# Altium PCB PCB1.PcbDoc
Units mm, origin at the board's own origin, x right, y up, seen from the top; angles counter-clockwise.
Board outline 53.21 x 28.07 mm, 2 copper layers (Top Layer, Bottom Layer); 11 components, 10 nets, 28 pads, 0 vias.
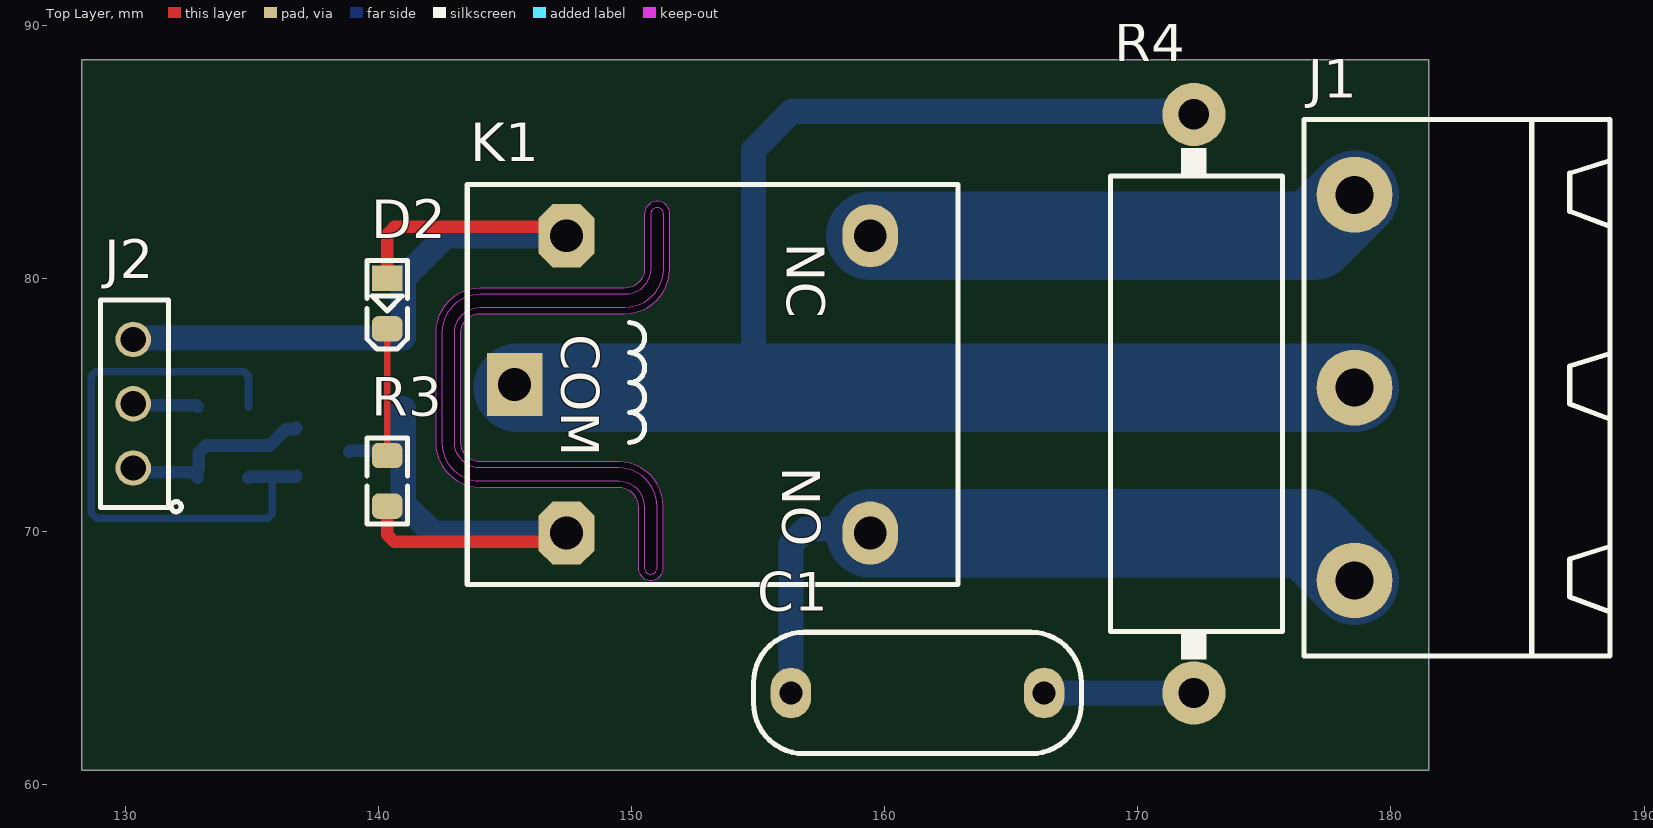
[diagram p0: Top Layer view]
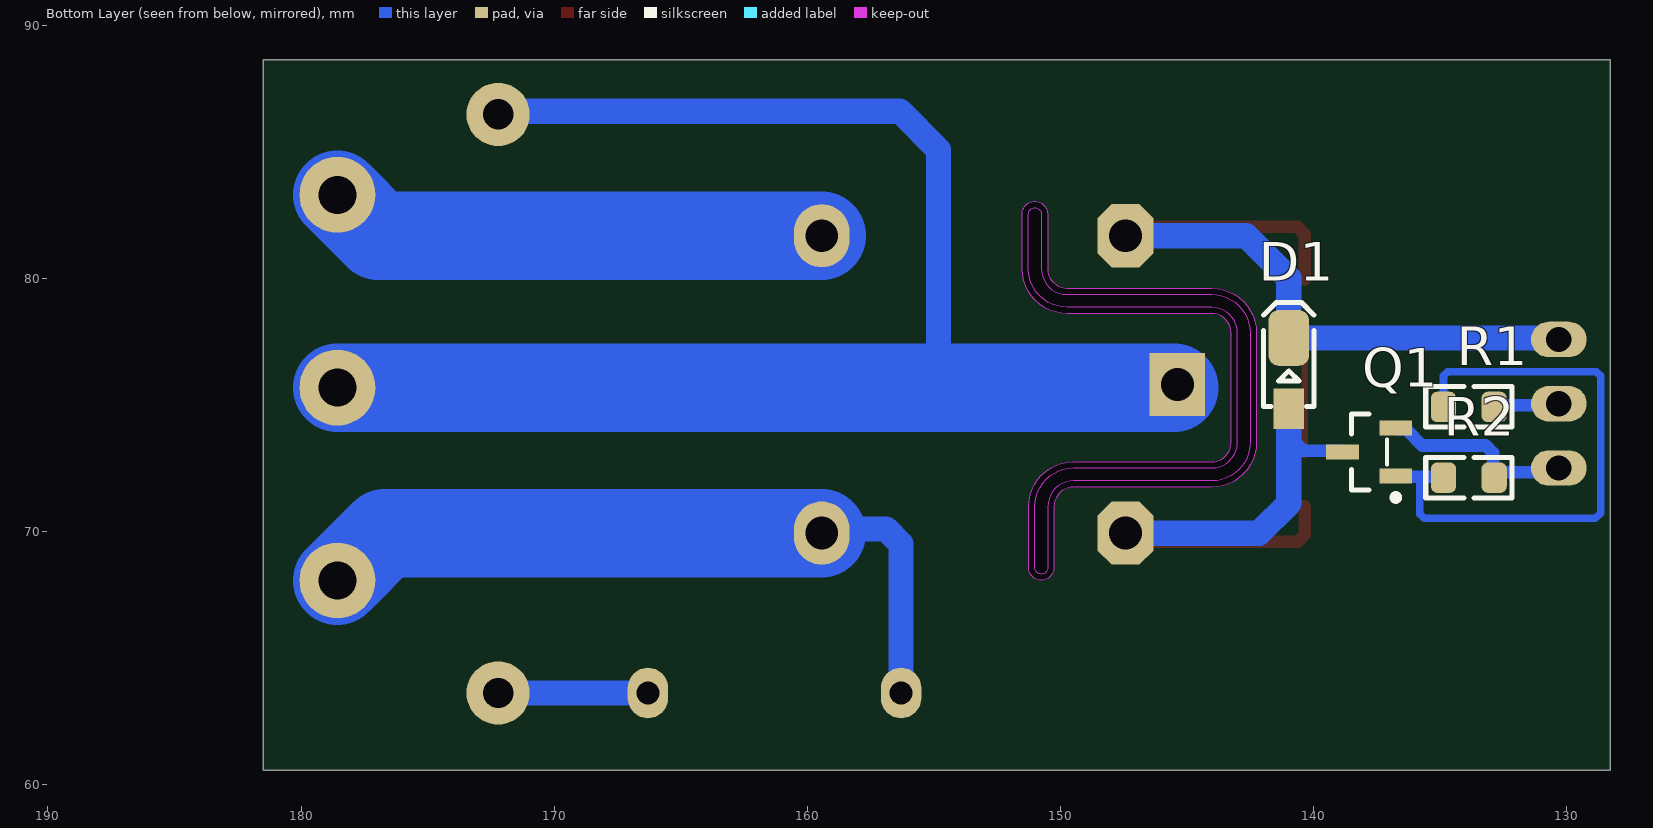
[diagram p1: Bottom Layer view, seen from below]
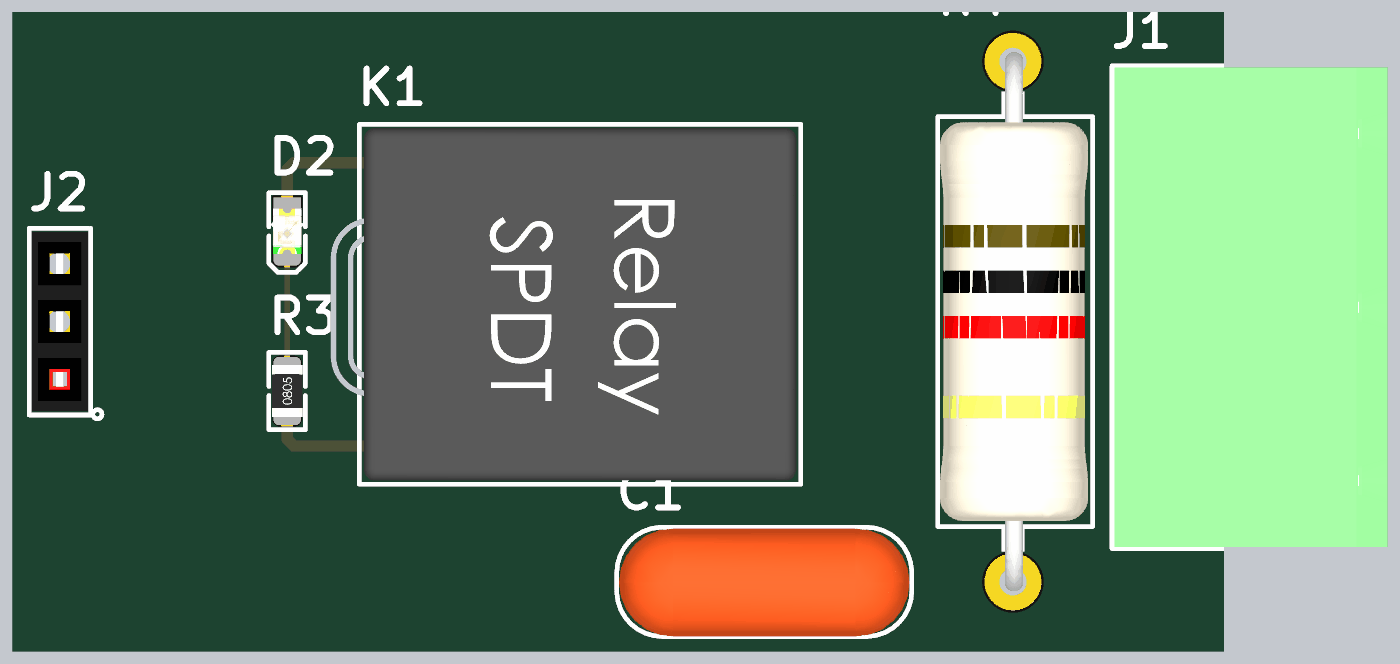
[diagram p2: 3D render of the assembled board from above, using the file's embedded part models]
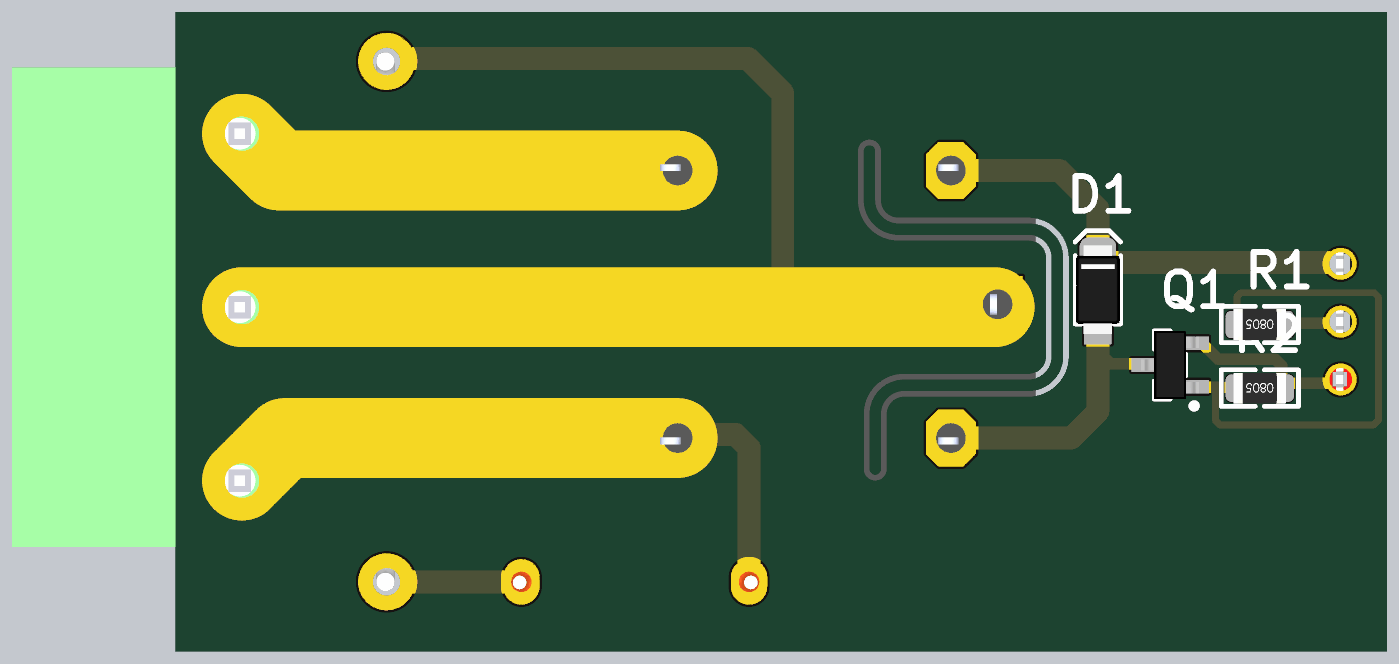
[diagram p3: 3D render of the assembled board from below, using the file's embedded part models]

## Layer stack, top to bottom
Top Solder: solder mask 0.0102, Solder Resist, Dk 3.5
Top Layer: signal copper 0.0356
Dielectric 1: dielectric 0.32, FR-4, Dk 4.8
Bottom Layer: signal copper 0.0356
Bottom Solder: solder mask 0.0102, Solder Resist, Dk 3.5

## Board outline
128.27,60.579 181.483,60.579 181.483,88.646 128.27,88.646
cut-out: 142.248,73.533 ccw(c144.018,73.533) 144.018,71.763 149.479,71.763 cw(c149.479,70.993) 150.249,70.993 150.249,68.58 ccw(c150.749,68.58) 151.249,68.58 151.249,70.993 ccw(c149.479,70.993) 149.479,72.763 144.018,72.763 cw(c144.018,73.533) 143.248,73.533 143.248,77.851 cw(c144.018,77.851) 144.018,78.621 149.733,78.621 ccw(c149.733,80.391) 151.503,80.391 151.503,82.55 ccw(c151.003,82.55) 150.503,82.55 150.503,80.391 cw(c149.733,80.391) 149.733,79.621 144.018,79.621 ccw(c144.018,77.851) 142.248,77.851
cut-out: 142.494,73.533 ccw(c144.018,73.533) 144.018,72.009 149.479,72.009 cw(c149.479,70.993) 150.495,70.993 150.495,68.58 ccw(c150.749,68.58) 151.003,68.58 151.003,70.993 ccw(c149.479,70.993) 149.479,72.517 144.018,72.517 cw(c144.018,73.533) 143.002,73.533 143.002,77.851 cw(c144.018,77.851) 144.018,78.867 149.733,78.867 ccw(c149.733,80.391) 151.257,80.391 151.257,82.55 ccw(c151.003,82.55) 150.749,82.55 150.749,80.391 cw(c149.733,80.391) 149.733,79.375 144.018,79.375 ccw(c144.018,77.851) 142.494,77.851

## Design rules (kind name [scope] priority, off if disabled: settings)
Clearance [All] p1: gap=0.254 ignorepadtopadclearanceinfootprint=FALSE except(0: Arc-Hole Track-Hole SMDPad-Hole THPad-Hole Via-Hole Fill-Hole Poly-Hole Region-Hole Text-Hole)
PolygonConnect [All] p1: connectstyle=Relief reliefconductorwidth=0.254 reliefentries=4 polygonreliefangle="90 Angle" airgapwidth=0.254
RoutingVias [All] p1: holewidth=0.711 width=1.27 viastyle="Through Hole" minholewidth=0.711 minwidth=1.27 maxholewidth=0.711 maxwidth=1.27
SolderMaskExpansion [All] p1: expansion=0.102 istentingtop=FALSE
Width [All] p1: maxlimit=5 minlimit=0.254 preferedwidth=0.254
30 further rules are at their usual default settings.

## Components (designator, comment, footprint, x,y, rotation, side; value= is the part's Value field where it differs from the comment)
C1 "0.1uF" C_PLY_13X5 161.29,63.627 r0 top
D1 "1N5819" D_SOD123W 140.97,76.454 r90 bottom
D2 "LED805GRN" LED0805GRN 140.335,79.019 r270 top
J1 "CONN_GMSTB3" GMSTB762_3 178.562,75.692 r270 top
J2 "HDRF3" HDR_F_1X3 130.302,75.057 r90 top
K1 "Value?" "Relay 18.85x15.35x15.70" 152.4,75.819 r270 top
Q1 "NPN" SOT23_N 137.795,73.152 r0 bottom
R1 "8.2K" R0805 133.858,74.93 r0 bottom
R2 "82K" R0805 133.858,72.136 r0 bottom
R3 "1K" R0805 140.335,72.009 r90 top
R4 "22b" R3W_AX09 172.212,75.057 r90 top

## Footprints (in the part's own frame and the unit in brackets; to place one, negate y for a bottom-side part, rotate by r counter-clockwise, add the part's x,y. Pads: shape width x height; smd on the part's side, far side on the other; paste and mask are expansions set on the pad)
C_PLY_13X5 [mm] "CAP, POLYESTER, 12.8X4.8 pitch: 10mm"
  oval 1.6x2 hole 0.9: 1(-5,0) 2(5,0)
  silkscreen extent -6.48,-2.4 6.48,2.4, body extent -6.37,-2.4 6.38,2.35, height 12.19
D_SOD123W [mm] "PowerDI-123, SOD123, DO-213AA, 1206D"
  rect 1.6x1.2 smd mask+0.1: 1(-1.6,0)
  rrect50% 2.2x1.6 smd mask+0.1: 2(1.2,0)
  Top Layer pour cut-out: -1.016,1.1 -1.016,-1.1 1.016,-1.1 1.016,1.1
  silkscreen extent -1.5,-1 2.6,1, body extent -1.95,-0.97 1.95,0.96, height 1
GMSTB762_3 [mm] "PHOENIX, GMSTB 2,5/3-G-7,62, 7.62mm pitch, 3pin"
  round 3 hole 1.5: 1(-7.62,0) 2(0,0) 3(7.62,0)
  silkscreen extent -10.6,-2 10.6,10.1, body extent -10.53,-1.9 10.53,10.1, height 9.1
HDR_F_1X3 [mm] "HEADER FEMALE pitch: 2.54mm"
  round 1.4 / inner round 1.4 / far side oval 1.4x2.2 hole 1 mask+0.1: 1(-2.54,0) 2(0,0) 3(2.54,0)
  silkscreen extent -4.27,-1.9 4.1,1.3, body extent -3.93,-1.3 3.94,1.2, height 8.5
LED0805GRN [mm] "LED SMD 0805, GREEN"
  rect 1x1.2 smd mask+0.075: 1(-1,0)
  rrect50% 1x1.2 smd mask+0.075: 2(1,0)
  Top Layer pour cut-out: -0.5,0.8 0.5,0.8 0.5,-0.8 -0.5,-0.8
  silkscreen extent -1.7,-0.8 1.8,0.8, body extent -1,-0.63 1,0.63, height 0.7
R3W_AX09 [mm] "RESISTOR 3 WATT, AXIAL0.9"
  round 2.5 hole 1.2: 1(-11.43,0) 2(11.43,0)
  silkscreen extent -10.1,-3.5 10.1,3.3, body extent -11.83,-3.3 11.83,3.2, height 6.5
R0805 [mm] "CHIP RESISTOR 1/8 WATT ,2.0X1.3mm, 0805, 2012"
  rrect50% 1x1.2 smd mask+0.05: 1(-1,0) 2(1,0)
  Top Layer pour cut-out: -0.5,0.8 0.5,0.8 0.5,-0.8 -0.5,-0.8
  silkscreen extent -1.7,-0.8 1.7,0.8, body extent -1.15,-0.67 1.15,0.67, height 0.76
"Relay 18.85x15.35x15.70" [mm] "DESIGNER ABBAS BASEREH"
  rect 2.5x2.2 hole 1.3: 1(0,-7.025)
  oval 2.5x2.2 hole 1.3: 2(-5.875,7.025) 3(5.875,7.025)
  oct 2.5x2.2 hole 1.3: 4(-5.875,-4.975) 5(5.875,-4.975)
  silkscreen extent -7.9,-8.9 7.9,10.5, body extent -7.75,-8.7 7.75,10.3, height 15.6
SOT23_N [mm] "SOT23, 3-Leads, Body 2.9x1.3mm, Pitch 0.95mm, Lead Span 2.3mm, IPC Medium Density"
  rect 1.3x0.6 smd: 1(-1.05,0.95) 2(-1.05,-0.95) 3(1.05,0)
  silkscreen extent -1.17,-1.5 0.7,1.92, body extent -1.27,-1.5 1.27,1.5, height 1.1

## Part data
C1: library part CAP_THD_FILMPLY_10N630V, "CAP, FILM, 10nF, 630V", ASSEMBLY=ASSEMBLY, DESC="CAP, FILM,", MANF=MANF, MANF_P#=MANF_PART#, PARAM=630V, PARAM2=PARAM2, PRICE="100= 1$"
D1: library part DIODE_SMD_SCHOTTKY_1N5819, "DIODE, SCHOTTKY, 40V, 1A", ASSEMBLY=ASSEMBLY, DESC=DESCRIPTION, MANF=DIODES, MANF_P#=1N5819HW-7-F, PARAM=40V, PARAM2=1A, PRICE=PRICE
D2: library part LED_SMD_0805_GRN, "LED, SMD, 0805, GREEN", ASSEMBLY=ASSEMBLY, DESC=DESCRIPTION, MANF=-, MANF_P#=-, PARAM=20mA, PARAM2=2.2V, PRICE=36t@Javan
J1: library part CONN_GMSTB762_3, "CONN, PHOENIX MSTB, 5-G, 5.08mm pitch", MANF_P#="GMSTB 2,5/3-G-7,62"
J2: library part HDR_F_1X3, "CONN, HEADER, Female, pitch: 2.54mm, 3POS"
K1: library part SW_Relay_SPDT, "SPDT Relay", Package=Dip, Rating=Rating?, Inflow=inflow?, Type=SPDT
Q1: library part Semi_BJT_2N2222_SMD, "NPN Switching Transistors", Package=Package?, Rating=Rating?, Inflow=5260, Type=Type?
R1 R2 R3: library part RES_SMD_0805, "RESISTOR, SMD", ASSEMBLY=ASSEMBLY, DESC=DESCRIPTION, DIST#=MOUSER, MANF=-, MANF_P#=-, PARAM=-W, PARAM2=1%, PRICE="100= 0.5$"
R4: library part RES_THD, "RESISTOR, THD", ASSEMBLY=ASSEMBLY, DESC=DESCRIPTION, DIST#=MOUSER, MANF="KOA SPEER", MANF_P#=RK73H1ETTP4701F, PARAM=0.063W, PARAM2=1%, PRICE="100= 0.5$"

## Nets (pads, with @x,y where several pads share a name; then routed paths per layer and width w, separated by ;. In a path a pad name is that pad's centre, name@x,y a point inside that pad or via, vN(x,y) a via of type N, cw(c..) or ccw(c..) an arc to the next point about the centre after c; other vN are vias at no path point)
+12: D1.2 D2.1 J2.3 K1.4 | length 29.3
  Top Layer w0.5: D2.1@140.335,79.978 140.335,81.749 140.628,82.042 147.077,82.042 K1.4
  Bottom Layer w1: J2.3 130.359,77.654 D1.2 140.97,80.01 142.654,81.694 K1.4
GND: J2.1 Q1.2 R2.1 | length 7.9
  Bottom Layer w0.5: J2.1 130.474,72.345 R2.1@132.649,72.345 ; R2.1 R2.1@132.649,72.345 ; Q1.2 136.695,74.052 136.345,74.052 135.699,73.406 133.188,73.406 132.895,73.113 132.895,72.486 132.754,72.345 R2.1@132.649,72.345
NetC1_1: C1.1 J1.3 K1.3 | length 29.2
  Bottom Layer w1: C1.1 156.29,69.518 156.876,70.104 159.265,70.104 K1.3
  Bottom Layer w3.5: K1.3 176.69,69.944 J1.3
NetC1_2: C1.2 R4.1 | length 5.9
  Bottom Layer w1: C1.2 R4.1
NetD1_1: D1.1 K1.5 Q1.3 R3.1 | length 21.5
  Top Layer w0.5: R3.1 140.335,69.889 140.628,69.596 147.077,69.596 K1.5
  Bottom Layer w0.5: Q1.3 138.895,73.202 140.39,73.202 140.848,73.66 140.97,73.66
  Bottom Layer w1: D1.1 140.97,73.66 140.97,71.12 142.146,69.944 K1.5
NetD2_2: D2.2 R3.2 | length 5
  Top Layer w0.254: R3.2 D2.2
NetJ1_1: J1.1 K1.2 | length 19.8
  Bottom Layer w3.5: K1.2 176.944,81.694 J1.1
NetJ1_2: J1.2 K1.1 R4.2 | length 60.5
  Bottom Layer w1: 154.813,75.692 154.813,85.09 156.337,86.614 172.085,86.614 R4.2
  Bottom Layer w3.5: K1.1@145.502,75.692 154.813,75.692 J1.2
NetJ2_2: J2.2 R1.1 | length 2.6
  Bottom Layer w0.5: J2.2 130.365,74.993 132.794,74.993 R1.1
NetQ1_1: Q1.1 R1.2 R2.2 | length 23.7
  Bottom Layer w0.3: R1.2 134.858,76.151 134.682,76.327 128.827,76.327 128.651,76.151 128.651,70.739 128.648,70.736 128.861,70.524 135.626,70.524 135.802,70.699 135.802,72.169
  Bottom Layer w0.5: R2.2 134.891,72.169 135.802,72.169 136.712,72.169 Q1.1

## Silkscreen, mask and mechanical layers (free items; w line width, h text height)
Mechanical 13:
  lines w1: 150.749,68.58 150.749,70.993 ccw(c149.479,70.993) 149.479,72.263 144.018,72.263 cw(c144.018,73.533) 142.748,73.533 142.748,77.851 cw(c144.018,77.851) 144.018,79.121 149.733,79.121 ccw(c149.733,80.391) 151.003,80.391 151.003,82.55

## Text inside footprints (layer, text, board x,y; h text height)
K1: Top Overlay "NC" at 156.134,81.407 h1.5 r270; Top Overlay "NO" at 155.956,72.568 h1.5 r270; Top Overlay "COM" at 147.218,77.8 h1.5 r270